# Altium PCB PixelClockController.PcbDoc
Units mm, origin at the board's own origin, x right, y up, seen from the top; angles counter-clockwise.
Board outline 100 x 45 mm, 2 copper layers (Component Side, Solder Side), stack 1.57 mm thick; 77 components, 52 nets, 289 pads, 48 vias.
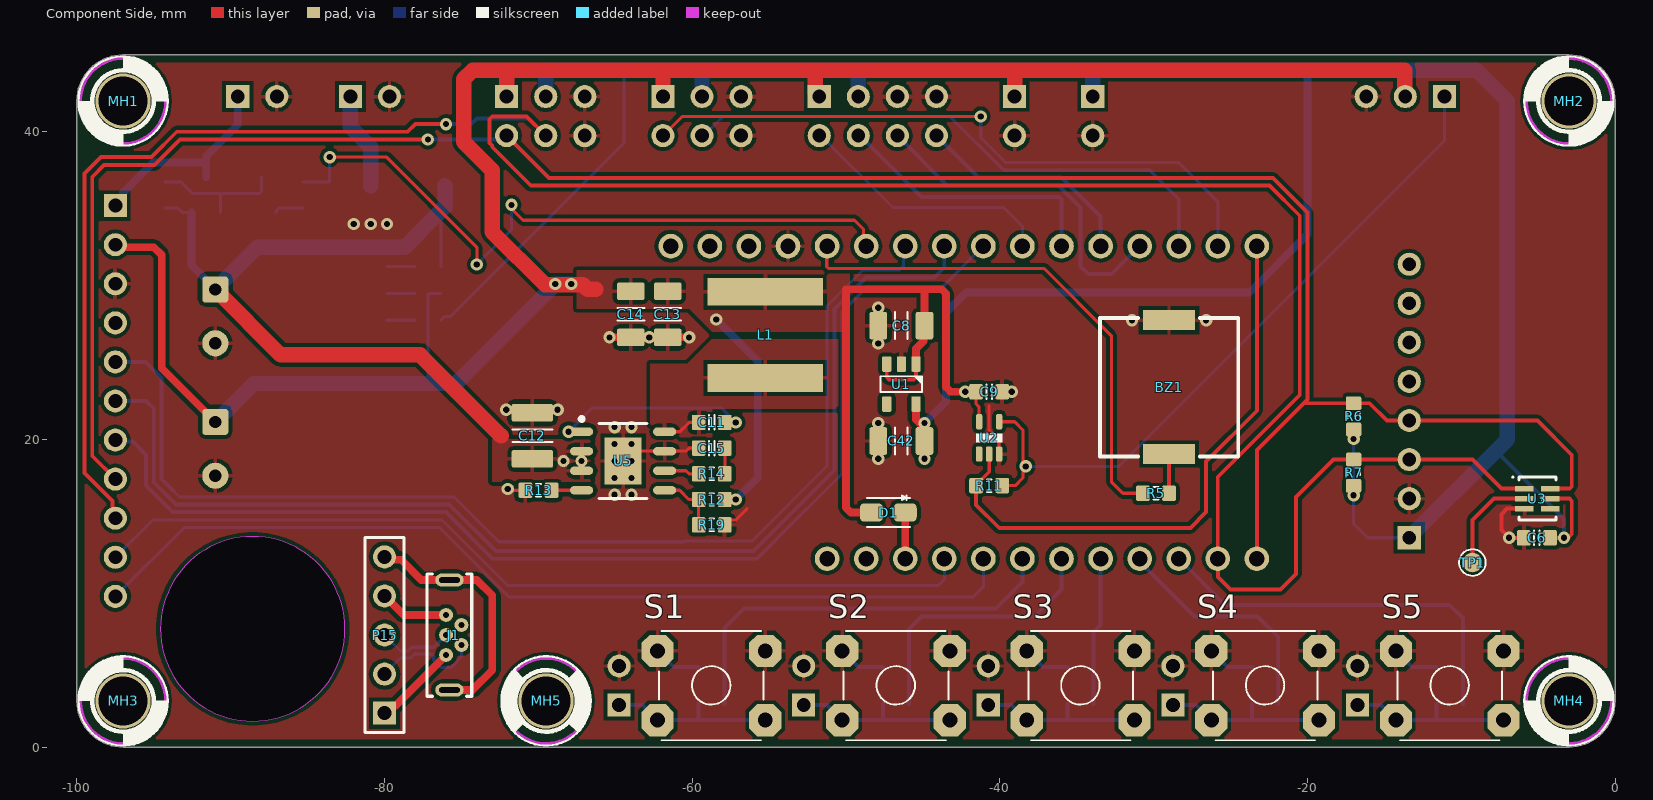
[diagram p0: Component Side view]
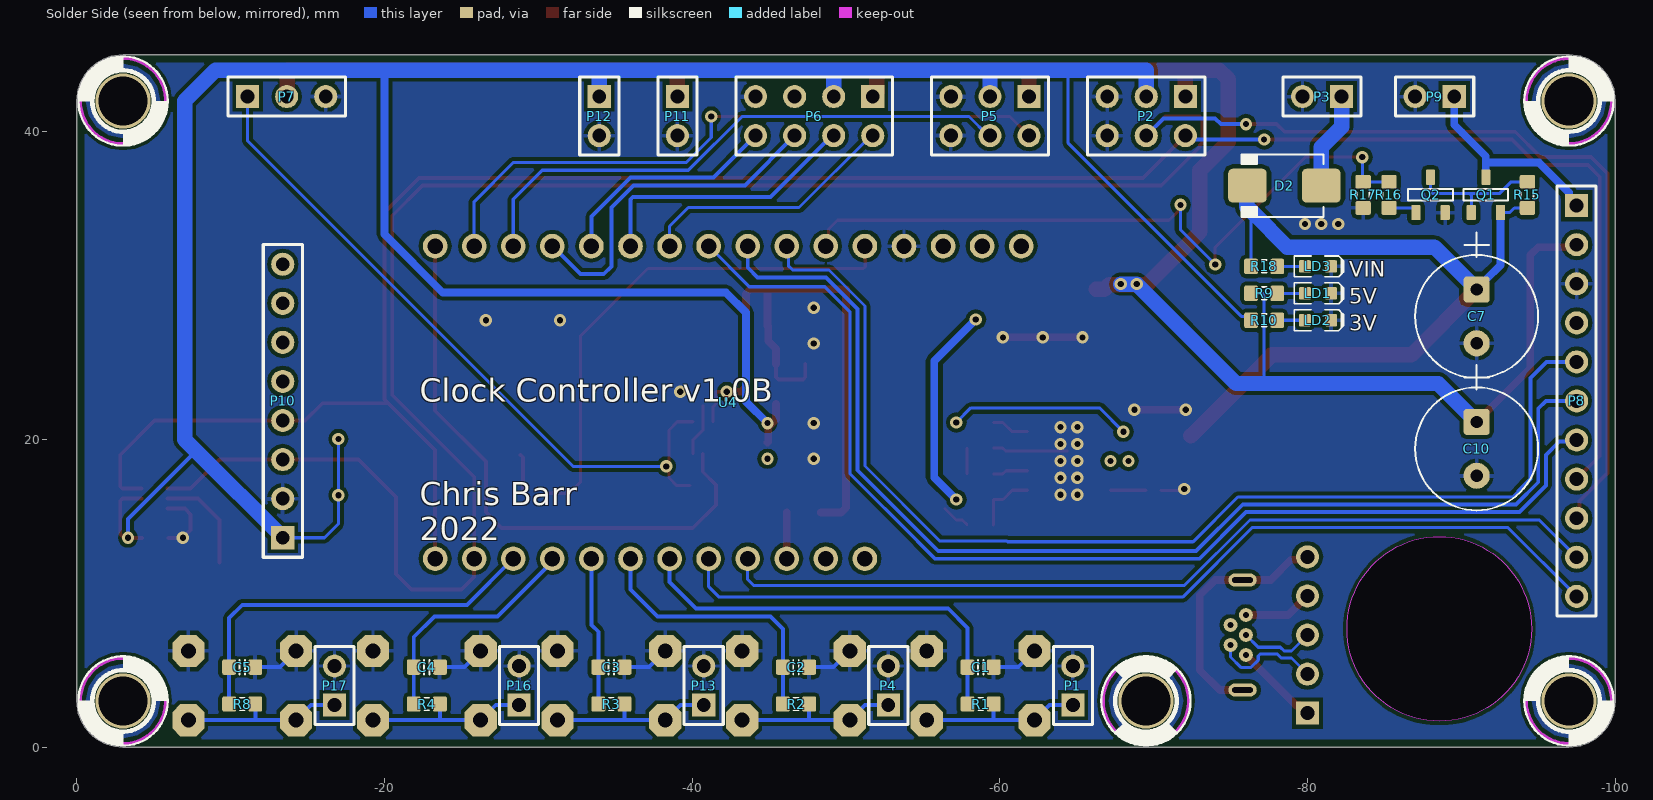
[diagram p1: Solder Side view, seen from below]
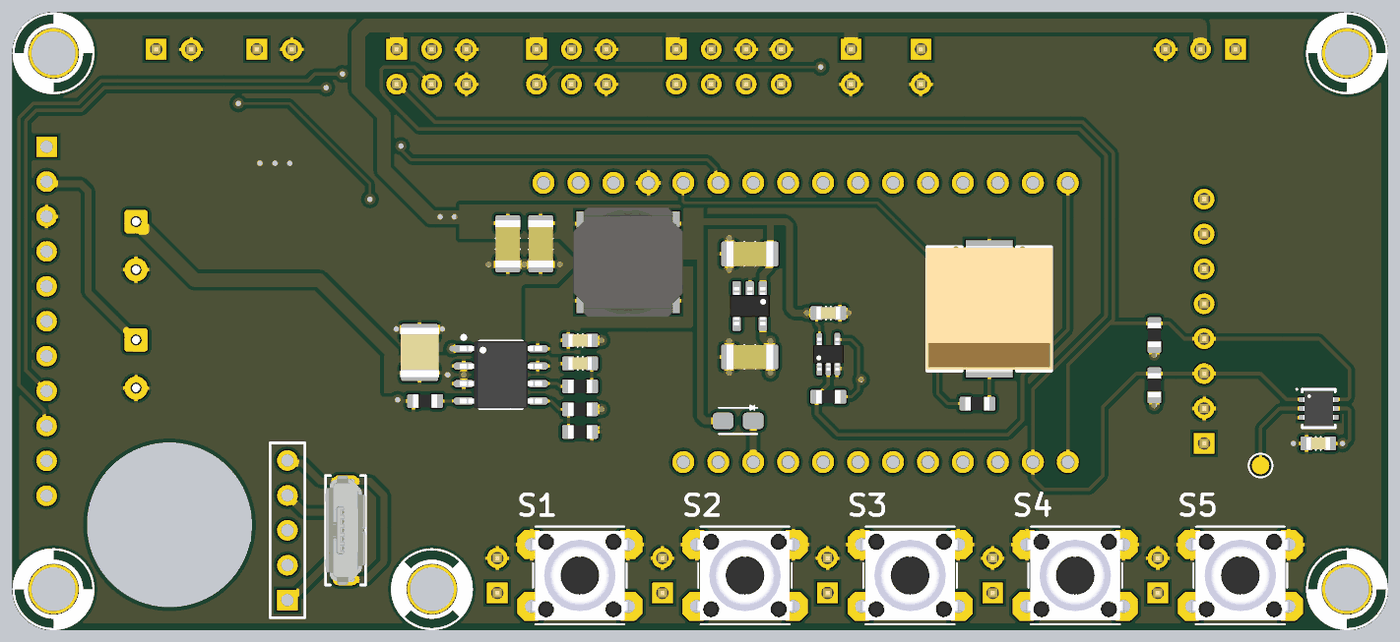
[diagram p2: 3D render of the assembled board from above, using the file's embedded part models]
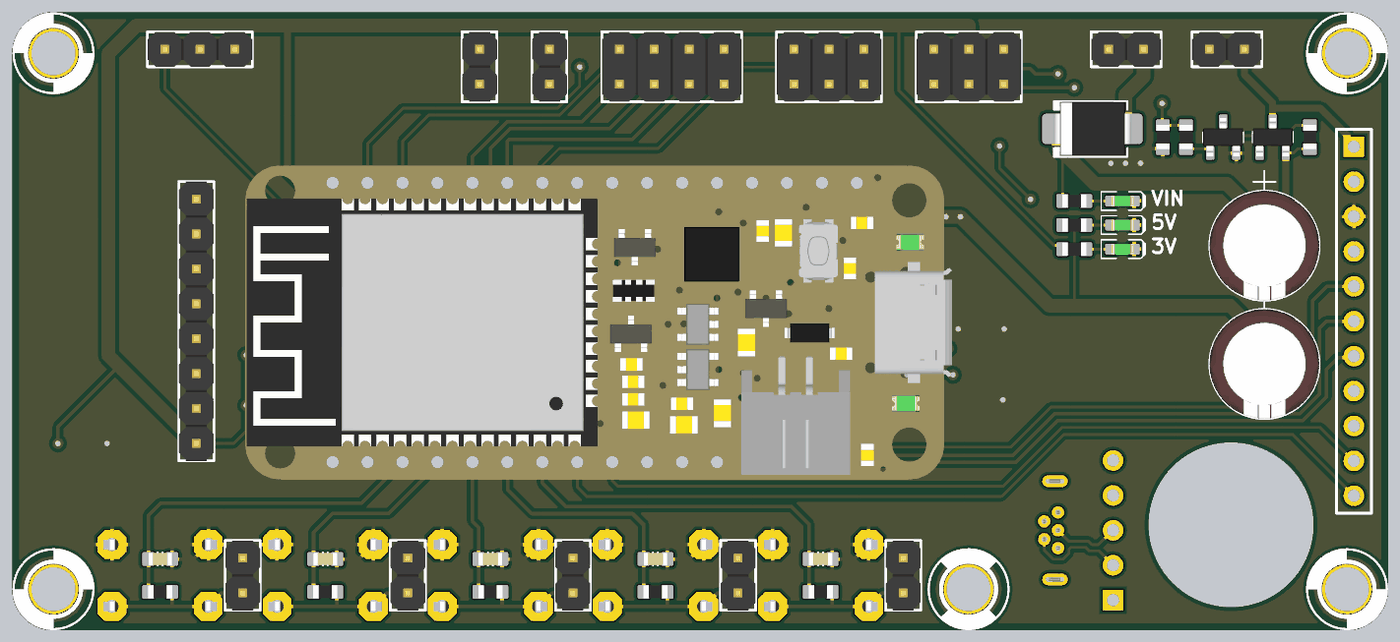
[diagram p3: 3D render of the assembled board from below, using the file's embedded part models]

## Layer stack, top to bottom
Top Solder: solder mask 0.0102, Solder Resist, Dk 3.5
Component Side: signal copper 0.035
Dielectric 3: prepreg 1.5, Dk 4.2
Solder Side: signal copper 0.035
Bottom Solder: solder mask 0.0102, Solder Resist, Dk 3.5

## Board outline
-100,2.993 -100,42 cw(c-97,42) -97.007,45 -3,45 cw(c-3,42) 0,42.007 0,3 cw(c-3,3) -2.993,0 -97,0 cw(c-97,3)
cut-out: -94.572,7.686 ccw(c-88.572,7.686) -88.572,1.686 ccw(c-88.572,7.686) -82.572,7.686 ccw(c-88.572,7.686) -88.572,13.686 ccw(c-88.572,7.686)

## Design rules (kind name [scope] priority, off if disabled: settings)
AssemblyTestPointUsage [All] p1 off:
AssemblyTestpoint [All] p1 off: testpointundercomponent=TRUE minsize=1.016 maxsize=2.54 preferedsize=1.524 minholesize=0 maxholesize=1.016 preferedholesize=0.813 testpointgrid=0.025 usegrid=TRUE gridtolerance=0 allowsidetop=TRUE allowsidebottom=TRUE
BoardOutlineClearance [All] p1: gap=0.254 ignorepadtopadclearanceinfootprint=FALSE except(0.5: Poly-OutlineEdge)
Clearance [All] p1: gap=0.25 ignorepadtopadclearanceinfootprint=FALSE except(0.2: Arc-SMDPad Track-SMDPad SMDPad-SMDPad)
ComponentClearance [All] p1: gap=0.2 collisioncheckmode=3 verticalgap=0.25 showdistances=FALSE
DiffPairsRouting [All] p1: maxlimit=1 minlimit=0.254 mostfreqgap=0.254 toplayer_minwidth=0.2 toplayer_maxwidth=0.4 toplayer_prefwidth=0.254 bottomlayer_minwidth=0.2 bottomlayer_maxwidth=0.4 bottomlayer_prefwidth=0.254 maxuncoupledlength=12.7
FabricationTestPointUsage [All] p1 off: valid=0 allowmultiple=FALSE
FabricationTestpoint [All] p1 off: side=3 testpointundercomponent=TRUE minsize=1.016 maxsize=2.54 preferedsize=1.524 minholesize=0 maxholesize=1.016 preferedholesize=0.813 testpointgrid=0.025 allowsidetop=TRUE allowsidebottom=TRUE usegrid=TRUE gridtolerance=0
HoleSize [All] p1: absolutevalues=TRUE maxlimit=4 minlimit=0.025 maxpercent=80.000 minpercent=20.000
MinimumSolderMaskSliver [All] p1: minsoldermaskwidth=0
NetAntennae [All] p1 off: netantennaetolerance=0
PolygonConnect PolygonConnect_Via [All vs IsVia] p1: connectstyle=Direct reliefconductorwidth=0.254 reliefentries=4 polygonreliefangle="90 Angle" airgapwidth=0.254
PolygonConnect [All] p2: connectstyle=Relief reliefconductorwidth=0.254 reliefentries=4 polygonreliefangle="90 Angle" airgapwidth=0.254
RoutingVias [All] p1: holewidth=0.4 width=0.8 viastyle="Through Hole" minholewidth=0.35 minwidth=0.7 maxholewidth=1 maxwidth=1.5
SilkToSilkClearance [All] p1: silktosilkclearance=0.1
SilkToSolderMaskClearance SilkscreenOverComponentPads [IsPad] p1: minsilkscreentomaskgap=0 clearancetoexposedcopper=TRUE
SolderMaskExpansion [All] p1: expansion=0.102 istentingtop=FALSE
Width Width_1 [All] p1: maxlimit=3 minlimit=0.2 preferedwidth=0.2 minimp=50.000000 maximp=50.000000 favimp=50.000000
19 further rules are at their usual default settings.

## Classes and differential pairs
differential pair USB: +USB_P -USB_N

## Components (designator, comment, footprint, x,y, rotation, side; value= is the part's Value field where it differs from the comment)
BZ1 "Piezo Transducer" PKMCS0909E4000-R1 -29,23.4 r90 top
C1 "Capacitor" CAPC1608X90N -58.75,5.2 r0 bottom value=0.1µF
C2 "Capacitor" CAPC1608X90N -46.75,5.2 r0 bottom value=0.1µF
C3 "Capacitor" CAPC1608X90N -34.75,5.2 r0 bottom value=0.1µF
C4 "Capacitor" CAPC1608X90N -22.75,5.2 r0 bottom value=0.1µF
C5 "Capacitor" CAPC1608X90N -10.75,5.2 r0 bottom value=0.1µF
C6 "Capacitor" CAPC1608X90N -5.088,13.606 r0 top value=0.1µF
C7 "CapE-8.0-THT-220uF-35V" CAPAE250P680X1220_VERT -91,28 r270 bottom value="220uF 35V"
C8 "Capacitor" CAPC3216X100N -46.4,27.4 r0 top value=22µF
C9 "Capacitor" CAPC1608X90N -40.69,23.1 r180 top value=0.1µF
C10 "CapE-8.0-THT-220uF-35V" CAPAE250P680X1220_VERT -91,19.39 r270 bottom value="220uF 35V"
C11 "Capacitor" CAPC1608X90N -58.727,21.105 r0 top value=0.1µF
C12 "Capacitor" CAPC3225X220N -70.39,20.235 r270 top value=10µF
C13 "Capacitor" CAPC3216X100N -61.59,28.135 r90 top value=22µF
C14 "Capacitor" CAPC3216X100N -63.99,28.135 r90 top value=22µF
C15 "Capacitor" CAPC1608X90N -58.727,19.435 r0 top value=2.7nF
C42 "Capacitor" CAPC3216X100N -46.4,19.9 r0 top value=22µF
D1 "" DIOM2616X08N -47.25,15.25 r180 top
D2 "Diode SK520BTR" DO-214AA -78.5,36.5 r0 bottom value="200V 5A"
J1 "Micro-USB B Socket" USB3131-XX-0230-X_revB -75.78,7.286 r90 top
L1 "Inductor SMD 3.6uH 4.9A" INDUCTOR_NR8040 -55.24,26.8 r90 top value=3.6uH
LD1 "LEDG  0603" "LED 1608-0603" -80.684,29.5 r180 bottom
LD2 "LEDG  0603" "LED 1608-0603" -80.684,27.75 r180 bottom
LD3 "LEDG  0603" "LED 1608-0603" -80.684,31.25 r180 bottom
MH1 "Screw Hole" M3-Hole-2 -97,42 r0 top
MH2 "Screw Hole" M3-Hole-2 -3,42 r90 top
MH3 "Screw Hole" M3-Hole-2 -97,3 r90 top
MH4 "Screw Hole" M3-Hole-2 -3,3 r0 top
MH5 "Screw Hole" M3-Hole-2 -69.5,3 r135 top
P1 "BTN1" HDR1X2-HEADER -64.75,2.73 r90 bottom
P2 "I2C" HDR2X3-Header -72.06,42.29 r0 bottom
P3 "PWR_IN" HDR1X2-HEADER -82.22,42.29 r0 bottom
P4 "BTN2" HDR1X2-HEADER -52.75,2.73 r90 bottom
P5 "UART" HDR2X3-Header -61.9,42.29 r0 bottom
P6 "SPI" HDR2X4-HEADER -51.74,42.29 r0 bottom
P7 "Header 3" HDR1X3-HEADER -11.1,42.29 r180 bottom
P8 "AMP" HDR1X11 -97.5,35.2 r270 bottom
P9 "SPKR_PWR" HDR1X2-HEADER -89.54,42.29 r0 bottom
P10 "RTC - DS3231 Breakout" HDR1X8-HEADER -13.384,13.61 r90 bottom
P11 "5V_AUX" HDR1X2-HEADER -39.04,42.29 r270 bottom
P12 "3V_AUX" HDR1X2-HEADER -33.96,42.29 r270 bottom
P13 "BTN3" HDR1X2-HEADER -40.75,2.73 r90 bottom
P15 "Header 5" HDR1X5 -80,2.206 r90 top
P16 "BTN4" HDR1X2-HEADER -28.75,2.73 r90 bottom
P17 "BTN5" HDR1X2-HEADER -16.75,2.73 r90 bottom
Q1 "Si2371EDS" "SOT23-3 New" -91.6,35.9 r90 bottom
Q2 "BC817" "SOT23-3 New" -88,35.9 r90 bottom
R1 "Resistor" "RES 1608-0603" -58.75,2.8 r0 bottom value=1K
R2 "Resistor" "RES 1608-0603" -46.75,2.8 r0 bottom value=1K
R3 "Resistor" "RES 1608-0603" -34.75,2.8 r0 bottom value=1K
R4 "Resistor" "RES 1608-0603" -22.75,2.8 r0 bottom value=1K
R5 "Resistor" "RES 1608-0603" -29.85,16.5 r0 top value=1K
R6 "Resistor" "RES 1608-0603" -17,21.5 r270 top value=10K
R7 "Resistor" "RES 1608-0603" -17,17.84 r270 top value=10K
R8 "Resistor" "RES 1608-0603" -10.75,2.8 r0 bottom value=1K
R9 "Resistor" "RES 1608-0603" -77.184,29.5 r0 bottom value=1K
R10 "Resistor" "RES 1608-0603" -77.184,27.75 r0 bottom value=1K
R11 "Res-0603-0R" "RES 1608-0603" -40.69,17 r0 top value=0R
R12 "Resistor" "RES 1608-0603" -58.727,16.095 r0 top value=115K
R13 "Resistor" "RES 1608-0603" -69.99,16.695 r0 top value=200K
R14 "Resistor" "RES 1608-0603" -58.727,17.765 r180 top value=15.8K
R15 "Resistor" "RES 1608-0603" -94.3,35.9 r270 bottom value=1K
R16 "Resistor" "RES 1608-0603" -85.3,35.9 r270 bottom value=1K
R17 "Resistor" "RES 1608-0603" -83.62,35.9 r90 bottom value=10K
R18 "Resistor" "RES 1608-0603" -77.184,31.25 r0 bottom value=10K
R19 "Resistor" "RES 1608-0603" -58.727,14.45 r180 top value=22.1K
S1 "SW_THT_PB_4.3mm" TACT-SWITCH-TS1143 -58.75,4 r0 top
S2 "SW_THT_PB_4.3mm" TACT-SWITCH-TS1143 -46.75,4 r0 top
S3 "SW_THT_PB_4.3mm" TACT-SWITCH-TS1143 -34.75,4 r0 top
S4 "SW_THT_PB_4.3mm" TACT-SWITCH-TS1143 -22.75,4 r0 top
S5 "SW_THT_PB_4.3mm" TACT-SWITCH-TS1143 -10.75,4 r0 top
TP1 "TESTPOINT" TP-R60 -9.28,12 r0 top
U1 "AP2112K-3.3TRG1" SOT23-5 -46.4,23.6 r270 top
U2 "74LVC1G17SE-7" SOT353 -40.69,20.1 r90 top
U3 "TSL25911FN" SON65P200X70-6N -5.053,16.15 r0 top
U4 "Feather Huzzah ESP32" "Adafruit Feather Huzzah ESP32" -51.23,32.57 r0 bottom locked
U5 "AP64500" SOIC127P600X140_HS-9N -64.49,18.6 r0 top

## Footprints (in the part's own frame and the unit in brackets; to place one, negate y for a bottom-side part, rotate by r counter-clockwise, add the part's x,y. Pads: shape width x height; smd on the part's side, far side on the other; paste and mask are expansions set on the pad)
"Adafruit Feather Huzzah ESP32" [mm]
  round 1.6 hole 1: 1(0,20.32) 2(2.54,20.32) 3(5.08,20.32) 4(7.62,20.32) 5(10.16,20.32) 6(12.7,20.32) 7(15.24,20.32) 8(17.78,20.32) 9(20.32,20.32) 10(22.86,20.32) 11(25.4,20.32) 12(27.94,20.32) 13(-10.16,0) 14(-7.62,0) 15(-5.08,0) 16(-2.54,0) 17(0,0) 18(2.54,0) 19(5.08,0) 20(7.62,0) 21(10.16,0) 22(12.7,0) 23(15.24,0) 24(17.78,0) 25(20.32,0) 26(22.86,0) 27(25.4,0) 28(27.94,0)
  body extent -17.05,-1.27 34.3,21.59, height 6.37
CAPAE250P680X1220_VERT [mm]
  round 0.508 on Mech15: 0(0,0)
  rrect25% 1.7x1.7 hole 0.8: 1(-1.75,0)
  round 1.7 hole 0.8: 2(1.75,0)
  silkscreen extent -5.45,-4 4,4, body extent -4,-4 4,4, height 11.5
CAPC1608X90N [mm] "Chip Capacitor, Body 1.6x0.8mm, EIA 0603, IPC Medium Density"
  round 0.254 on Mech15: 0(0,0)
  rrect25% 0.9x1 smd: 1(-0.85,0) 2(0.85,0)
  Component Side pour cut-out: -0.6,0.5 -0.4,0.7 0.4,0.7 0.6,0.5 0.6,-0.5 0.4,-0.7 -0.4,-0.7 -0.6,-0.5
  silkscreen extent -0.18,-0.48 0.18,0.48, body extent -0.85,-0.45 0.85,0.45, height 0.89
CAPC3216X100N [mm] "Chip Capacitor, Body 3.2x1.6mm, 1.0mm H, EIA 1206, IPC Medium Density"
  round 0.508 on Mech15: 0(0,0)
  rrect25% 1.15x1.8 smd: 1(-1.5,0) 2(1.5,0)
  silkscreen extent -0.4,-0.88 0.4,0.88, body extent -1.7,-0.9 1.7,0.9, height 1
CAPC3225X220N [mm] "Chip Capacitor, Body 3.2x2.5mm, EIA 1210, IPC Medium Density"
  round 0.508 on Mech15: 0(0,0)
  rrect25% 1.15x2.7 smd: 1(-1.5,0) 2(1.5,0)
  silkscreen extent -0.4,-1.3 0.4,1.3, body extent -1.8,-1.4 1.8,1.4, height 2.19
DIOM2616X08N [mm] "Molded Diode, 2-Leads, Body 2.60x1.60mm, IPC Medium Density"
  rrect50% 1.5x1.2 smd: A(1.1,0) K(-1.1,0)
  silkscreen extent -1.4,-1.11 1.4,0.95, body extent -1.35,-0.85 1.35,0.85, height 0.85
DO-214AA [mm] "JEDEC DO214 variation AA. SMB"
  round 0.508 on Mech15: 0(0,0)
  rrect25% 2.5x2.2 smd: A(-2.4,0) K(2.4,0)
  silkscreen extent -2.54,-2.03 2.79,2.03, body extent -2.8,-1.97 2.8,1.98, height 2.62
HDR1X2-HEADER [mm]
  rect 1.5x1.5 hole 0.9: 1(0,0)
  round 1.5 hole 0.9: 2(2.54,0)
  silkscreen extent -1.27,-1.27 3.81,1.27, body extent -1.27,-1.27 3.81,1.27, height 8.6
HDR1X3-HEADER [mm]
  rect 1.5x1.5 hole 0.9: 1(0,0)
  round 1.5 hole 0.9: 2(2.54,0) 3(5.08,0)
  silkscreen extent -1.27,-1.27 6.35,1.27, body extent -1.27,-1.27 6.35,1.27, height 8.6
HDR1X5 [mm] "Connector; Header; 5 Position"
  rect 1.5x1.5 hole 0.9: 1(0,0)
  round 1.5 hole 0.9: 2(2.54,0) 3(5.08,0) 4(7.62,0) 5(10.16,0)
  silkscreen extent -1.27,-1.27 11.43,1.27
HDR1X8-HEADER [mm]
  rect 1.5x1.5 hole 0.9: 1(0,0)
  round 1.5 hole 0.9: 2(2.54,0) 3(5.08,0) 4(7.62,0) 5(10.16,0) 6(12.7,0) 7(15.24,0) 8(17.78,0)
  silkscreen extent -1.27,-1.27 19.05,1.27, body extent -1.27,-1.27 19.05,1.27, height 8.6
HDR1X11 [mm] "Connector; Header; 11 Position"
  rect 1.5x1.5 hole 0.9: 1(0,0)
  round 1.5 hole 0.9: 2(2.54,0) 3(5.08,0) 4(7.62,0) 5(10.16,0) 6(12.7,0) 7(15.24,0) 8(17.78,0) 9(20.32,0) 10(22.86,0) 11(25.4,0)
  silkscreen extent -1.27,-1.27 26.67,1.27
HDR2X3-Header [mm]
  rect 1.5x1.5 hole 0.9: 1(0,0)
  round 1.5 hole 0.9: 2(0,2.54) 3(2.54,0) 4(2.54,2.54) 5(5.08,0) 6(5.08,2.54)
  silkscreen extent -1.27,-1.27 6.35,3.81, body extent -1.27,-1.27 6.35,3.81, height 8.6
HDR2X4-HEADER [mm]
  rect 1.5x1.5 hole 0.9: 1(0,0)
  round 1.5 hole 0.9: 2(0,2.54) 3(2.54,0) 4(2.54,2.54) 5(5.08,0) 6(5.08,2.54) 7(7.62,0) 8(7.62,2.54)
  silkscreen extent -1.27,-1.27 8.89,3.81, body extent -1.27,-1.27 8.89,3.81, height 8.6
INDUCTOR_NR8040 [mm]
  rect 1.8x7.5 smd: 1(-2.8,0) 2(2.8,0)
  body extent -4,-4 4,4, height 4
"LED 1608-0603" [mm]
  round 0.254 on Mech15: 0(0,0)
  rrect25% 0.8x0.8 smd: 1(-0.85,0) 2(0.85,0)
  Component Side pour cut-out: -0.5,0.5 0.5,0.5 0.5,-0.5 -0.5,-0.5
  silkscreen extent -1.55,-0.67 1.68,0.67, body extent -0.8,-0.4 0.8,0.4, height 0.75
M3-Hole-2 [mm]
  round 3.6 hole 3.2: M3(0,0)
  silkscreen extent -2.9,-2.93 2.9,2.93
PKMCS0909E4000-R1 [mm]
  rect 1.3x3.4 smd: 1(-4.35,0) 2(4.35,0)
  silkscreen extent -4.5,-4.5 4.5,4.5, body extent -4.6,-4.6 4.6,4.6, height 1.96
"RES 1608-0603" [mm]
  round 0.254 on Mech15: 0(0,0)
  rrect25% 0.9x1 smd: 1(-0.85,0) 2(0.85,0)
  Component Side pour cut-out: -0.6,0.5 -0.4,0.7 0.4,0.7 0.6,0.5 0.6,-0.5 0.4,-0.7 -0.4,-0.7 -0.6,-0.5
  silkscreen extent -0.15,-0.41 0.15,0.41, body extent -0.87,-0.47 0.88,0.48, height 0.54
SOIC127P600X140_HS-9N [mm] "SOIC, 8-Leads, Body 4.88x3.88mm, Pitch 1.27mm, Thermal Pad 3.05x2.41mm, IPC Medium Density"
  oval 1.5x0.55 smd: 1(-2.7,1.905) 2(-2.7,0.635) 3(-2.7,-0.635) 4(-2.7,-1.905) 5(2.7,-1.905) 6(2.7,-0.635) 7(2.7,0.635) 8(2.7,1.905)
  rect 2.41x3.05 smd: 9(0,0)
  silkscreen extent -2.82,-2.45 1.55,2.85, body extent -3,-2.45 3,2.45, height 1.4
SON65P200X70-6N [mm] "SON, 6-Leads, Body 2.40x2.00mm, Pitch 0.65mm, IPC Medium Density"
  rect 1.2x0.35 smd: 1(-0.84,0.65) 2(-0.84,0) 3(-0.84,-0.65) 4(0.84,-0.65) 5(0.84,0) 6(0.84,0.65)
  silkscreen extent -1.65,-1.4 1.2,1.45, body extent -1.1,-1.25 1.1,1.25, height 0.7
"SOT23-3 New" [mm] "SOT23, 3 pin"
  round 0.5 on Mech15: 0(0,0)
  rrect25% 1x0.6 smd: 1(-1.15,0.95) 2(-1.15,-0.95) 3(1.15,0)
  silkscreen extent -0.38,-1.45 0.38,1.45, body extent -1.4,-1.45 1.4,1.45, height 1.29
SOT23-5 [mm]
  round 0.5 on Mech15: 0(0,0)
  rrect25% 1x0.6 smd: 1(-1.3,0.95) 2(-1.3,0) 3(-1.3,-0.95) 4(1.3,-0.95) 5(1.3,0.95)
  silkscreen extent -0.51,-1.35 0.51,1.35, body extent -1.4,-1.45 1.4,1.45, height 1.44
SOT353 [mm] "Small outline 2.1mm L x 1.25mm W x 1mm H; 5LD SC-70; SC-88A"
  round 0.5 on Mech15: 0(0,0)
  rrect50% 1x0.4 smd: 1(-1.05,0.65) 2(-1.05,0) 3(-1.05,-0.65) 4(1.05,-0.65) 5(1.05,0.65)
  silkscreen extent -0.3,-0.85 0.3,0.85, body extent -1.2,-1.1 1.2,1.1, height 1.1
TACT-SWITCH-TS1143 [mm] "Bondtact sealed TH tact switch"
  round 0.508 on Mech15: 0(0,0)
  oct 2.1x2.1 hole 0.965: 1(-3.5,-2.25) 1(3.5,-2.25) 2(-3.5,2.25) 2(3.5,2.25)
  silkscreen extent -3.4,-3.56 3.4,3.56, body extent -4.13,-3.25 4.13,3.25, height 4.3
TP-R60 [mm]
  round 1.27 smd paste-1.27: 1(0,0)
  silkscreen extent -0.86,-0.86 0.86,0.86, body extent -0.76,-0.76 0.76,0.76, height 0.25
USB3131-XX-0230-X_revB [mm] "Micro USB Receptacle, Type B, Through-Hole, Vertical, with 2.3mm Shell Stakes"
  round 0.9 hole 0.4: 1(-1.3,0.22) 2(-0.65,-0.78) 3(0,0.22) 4(0.65,-0.78) 5(1.3,0.22)
  oval 0.85x1.85 hole 0.35 slot 1.35 at 90 deg: S(-3.575,0) S(3.575,0)
  silkscreen extent -3.98,-1.45 3.98,1.45, body extent -3.97,-1.47 3.98,1.47, height 5.64

## Part data
BZ1: "AUDIO PIEZO TRANSDUCER 12.5V SMD 9 x 9MM", Supplier Part Number 1=490-9647-1-ND, Supplier 1=Digi-Key
C1 C2 C3 C4 C5 C6 C9 C11: library part UMJ107BB7104KAHT, "CAP CER 0.1UF 50V X7R 0603", Manufacturer 1="Taiyo Yuden", Operating Temperature="-55°C ~ 125°C", Package=0402, Package / Case="0603 (1608 Metric)", Supplier Part Number 1=587-4474-1-ND, Temperature Coefficient=X7R, TOLERANCE=±10%, Voltage=50V, Manufacturer Part Number 1=UMJ107BB7104KAHT, Note="Approved sub OK", Revision="July-2002: Re-released for DXP Platform.", Size / Dimension="0.063\" L x 0.031\" W (1.60mm x 0.80mm)", Supplier 1=Digi-Key, Thickness (Max)="0.039\" (1.00mm)", Type=X5R
C7 C10: "CAP ALUM 220UF 20% 35V RADIAL", Supplier Part Number 1=732-8946-1-ND, Note="Approved sub OK", Published=8-Jun-2000, Publisher="Altium Limited", Revision="July-2002: Re-released for DXP Platform.", Supplier 1=Digi-Key
C8 C13 C14 C42: library part EMK316ABJ226KL-T, "CAP CER 22UF 16V X5R 1206", Manufacturer 1="Taiyo Yuden", Operating Temperature="-55°C ~ 85°C", Package=0402, Package / Case="1206 (3216 Metric)", Supplier Part Number 1=587-5521-1-ND, Temperature Coefficient=X5R, TOLERANCE=±10%, Voltage=16V, Manufacturer Part Number 1=EMK316ABJ226KL-T, Note="Approved sub OK", Revision="July-2002: Re-released for DXP Platform.", Size / Dimension="0.126\" L x 0.063\" W (3.20mm x 1.60mm)", Supplier 1=Digi-Key, Thickness (Max)="0.071\" (1.80mm)", Type=X5R
C12: library part GMJ325KB7106KMHP, "CAP CER 10UF 35V X7R 1210", Manufacturer 1="Taiyo Yuden", Operating Temperature="-55°C ~ 125°C", Package=0402, Package / Case="1210 (3225 Metric)", Supplier Part Number 1=587-4890-1-ND, Temperature Coefficient=X7R, TOLERANCE=±10%, Voltage=35V, Manufacturer Part Number 1=GMJ325KB7106KMHP, Note="Approved sub OK", Revision="July-2002: Re-released for DXP Platform.", Size / Dimension="0.126\" L x 0.098\" W (3.20mm x 2.50mm)", Supplier 1=Digi-Key, Thickness (Max)="0.110\" (2.80mm)", Type=X5R
C15: library part C1608X7R2A222K080AE, "CAP CER 2700PF 50V X7R 0603", Manufacturer 1="TDK Corporation", Operating Temperature="-55°C ~ 125°C", Package=0402, Package / Case="0603 (1608 Metric)", Supplier Part Number 1=1292-1423-2-ND, Temperature Coefficient=X7R, TOLERANCE=±10%, Voltage=100V, Manufacturer Part Number 1=C1608X7R2A222K080AE, Note="Approved sub OK", Revision="July-2002: Re-released for DXP Platform.", Size / Dimension="0.063\" L x 0.031\" W (1.60mm x 0.80mm)", Supplier 1=Digi-Key, Thickness (Max)="0.035\" (0.90mm)", Type=X5R
D1: library part "Diode Schottky 2A 40V (SS24FL)", "DIODE SCHOTTKY 40V 2A SOD123F", Manufacturer 1="ON Semiconductor", Manufacturer Part Number 1=SS24FL, Supplier Part Number 1=SS24FLCT-ND, Code - JEDEC=SOD-123F, Note="Approved sub OK", Published=8-Jun-2000, Publisher="Altium Limited", Revision="July-2002: Re-released for DXP Platform.", Supplier 1=Digi-Key
D2: "DIODE SCHOTTKY 200V 5A SMB", Supplier Part Number 1=1655-1602-1-ND, Code - JEDEC=DO-214-AB, Published=8-Jun-2000, Publisher="Altium Limited", Revision="July-2002: Re-released for DXP Platform.", Supplier 1=Digi-Key
J1: library part "Micro-USB B Socket Vertical", "MICRO B SKT, VERTICAL, TH, 30\",", Supplier Part Number 1=2073-USB3131-30-0230-ACT-ND, Note="Approved sub OK", Supplier 1=Digi-Key
L1: "FIXED IND 3.6UH 4.9A 19.5 MOHM", Supplier Part Number 1=587-1998-1-ND, Published=24-Mar-1999, Publisher="Altium Limited", Revision="July-2002: Re-released for DXP Platform.", Supplier 1=Digi-Key
LD1 LD2 LD3: "LED GREEN CLEAR CHIP SMD 0603", Supplier Part Number 1=160-1435-2-ND, Note="Approved sub OK", Supplier 1=Digi-Key
P1 P3 P4 P9 P11 P12 P13 P16 P17: library part "Header 1X2", "Header, 2-Pin", Manufacturer 1="Generic Header", Note="Approved sub OK"
P2 P5: library part "Header 2X3", "Header, 3-Pin, Dual row", Manufacturer 1="Generic Header", Note="Approved sub OK"
P6: library part "Header 2X4", "Header, 4-Pin, Dual row", Manufacturer 1="Generic Header", Note="Approved sub OK"
P7: library part "Header 1X3", "Header, 3-Pin", Manufacturer 1="Generic Header", Note="Approved sub OK"
P8: library part "Header 11", "Header, 11-Pin", LatestRevisionDate=17-Jul-2002, LatestRevisionNote="Re-released for DXP Platform.", Publisher="Altium Limited"
P10: library part "Header 1X8", "Header, 8-Pin", Manufacturer 1="Generic Header", Note="Approved sub OK"
P15: "Header, 5-Pin", LatestRevisionDate=17-Jul-2002, LatestRevisionNote="Re-released for DXP Platform.", Publisher="Altium Limited"
Q1: library part "MOSFET - Si2371EDS", "MOSFET SMD P-CH 30V 4.8A SOT-23-3", Supplier Part Number 1=SI2371EDS-T1-GE3CT-ND, FET Type="MOSFET P-Channel, Metal Oxide", Supplier 1=Digi-Key
Q2: library part "Transistor - NPN - 45V 500MA - BC817", "TRANS NPN 45V 500MA TO236AB", Supplier Part Number 1=1727-6186-1-ND, Supplier 1=Digi-Key
R1 R2 R3 R4 R5 R8 R9 R10 R15 R16: library part RC0603FR-071KL, "RES SMD 1K OHM 1% 1/10W 0603", Manufacturer 1=Yageo, Operating Temperature="-55°C ~ 155°C", Package / Case="0603 (1608 Metric)", Power (Watts)="0.1W, 1/10W", Supplier Part Number 1=311-1.00KHRCT-ND, Temperature Coefficient=±100ppm/°C, TOLERANCE=±1%, Composition="Thick Film", Features="Moisture Resistant", Height - Seated (Max)="0.022\" (0.55mm)", Manufacturer Part Number 1=RC0603FR-071KL, Note="Approved sub OK", Published=8-Jun-2000, Publisher="Altium Limited", Revision="July-2002: Re-released for DXP Platform.", Size / Dimension="0.063\" L x 0.031\" W (1.60mm x 0.80mm)", Supplier 1=Digi-Key
R6 R7 R17 R18: library part RC0603FR-0710KL, "RES SMD 10K OHM 1% 1/10W 0603", Manufacturer 1=Yageo, Operating Temperature="-55°C ~ 155°C", Package / Case="0603 (1608 Metric)", Power (Watts)="0.1W, 1/10W", Supplier Part Number 1=311-10.0KHRCT-ND, Temperature Coefficient=±100ppm/°C, TOLERANCE=±1%, Composition="Thick Film", Features="Moisture Resistant", Height - Seated (Max)="0.022\" (0.55mm)", Manufacturer Part Number 1=RC0603FR-0710KL, Note="Approved sub OK", Published=8-Jun-2000, Publisher="Altium Limited", Revision="July-2002: Re-released for DXP Platform.", Size / Dimension="0.063\" L x 0.031\" W (1.60mm x 0.80mm)", Supplier 1=Digi-Key
R11: "RES 0 OHM JUMPER 1/10W 0603", Supplier Part Number 1=311-0.0GRCT-ND, Note="Approved sub OK", Published=8-Jun-2000, Publisher="Altium Limited", Revision="July-2002: Re-released for DXP Platform.", Supplier 1=Digi-Key
R12: library part RC0603FR-07115KL, "RES SMD 115K OHM 1% 1/10W 0603", Manufacturer 1=Yageo, Operating Temperature="-55°C ~ 155°C", Package / Case="0603 (1608 Metric)", Power (Watts)="0.1W, 1/10W", Supplier Part Number 1=311-115KHRCT-ND, Temperature Coefficient=±100ppm/°C, TOLERANCE=±1%, Composition="Thick Film", Features="Moisture Resistant", Height - Seated (Max)="0.022\" (0.55mm)", Manufacturer Part Number 1=RC0603FR-07115KL, Note="Approved sub OK", Published=8-Jun-2000, Publisher="Altium Limited", Revision="July-2002: Re-released for DXP Platform.", Size / Dimension="0.063\" L x 0.031\" W (1.60mm x 0.80mm)", Supplier 1=Digi-Key
R13: library part RC0603FR-07200KL, "RES SMD 200K OHM 1% 1/10W 0603", Manufacturer 1=Yageo, Operating Temperature="-55°C ~ 155°C", Package / Case="0603 (1608 Metric)", Power (Watts)="0.1W, 1/10W", Supplier Part Number 1=311-200KHRCT-ND, Temperature Coefficient=±100ppm/°C, TOLERANCE=±1%, Composition="Thick Film", Features="Moisture Resistant", Height - Seated (Max)="0.022\" (0.55mm)", Manufacturer Part Number 1=RC0603FR-07200KL, Note="Approved sub OK", Published=8-Jun-2000, Publisher="Altium Limited", Revision="July-2002: Re-released for DXP Platform.", Size / Dimension="0.063\" L x 0.031\" W (1.60mm x 0.80mm)", Supplier 1=Digi-Key
R14: library part RC0603FR-0715K8L, "RES SMD 15.8K OHM 1% 1/10W 0603", Manufacturer 1=Yageo, Operating Temperature="-55°C ~ 155°C", Package / Case="0603 (1608 Metric)", Power (Watts)="0.1W, 1/10W", Supplier Part Number 1=311-15.8KHRCT-ND, Temperature Coefficient=±100ppm/°C, TOLERANCE=±1%, Composition="Thick Film", Features="Moisture Resistant", Height - Seated (Max)="0.022\" (0.55mm)", Manufacturer Part Number 1=RC0603FR-0715K8L, Note="Approved sub OK", Published=8-Jun-2000, Publisher="Altium Limited", Revision="July-2002: Re-released for DXP Platform.", Size / Dimension="0.063\" L x 0.031\" W (1.60mm x 0.80mm)", Supplier 1=Digi-Key
R19: library part RC0603FR-0722K1L, "RES SMD 22.1K OHM 1% 1/10W 0603", Manufacturer 1=Yageo, Operating Temperature="-55°C ~ 155°C", Package / Case="0603 (1608 Metric)", Power (Watts)="0.1W, 1/10W", Supplier Part Number 1=311-22.1KHRCT-ND, Temperature Coefficient=±100ppm/°C, TOLERANCE=±1%, Composition="Thick Film", Features="Moisture Resistant", Height - Seated (Max)="0.022\" (0.55mm)", Manufacturer Part Number 1=RC0603FR-0722K1L, Note="Approved sub OK", Published=8-Jun-2000, Publisher="Altium Limited", Revision="July-2002: Re-released for DXP Platform.", Size / Dimension="0.063\" L x 0.031\" W (1.60mm x 0.80mm)", Supplier 1=Digi-Key
S1 S2 S3 S4 S5: "6 X 6 MM, 12 MM ACTUATOR HEIGHT", Manufacturer 1="CUI Devices", Manufacturer Part Number 1=TS02-66-120-BK-160-LCR-D, Package / Case="6.5x6.5mm; 4.3mm stem", Supplier Part Number 1=2223-TS02-66-120-BK-160-LCR-D-ND, Material="Brass/Nylon/Ag plating", Supplier 1=Digi-Key
TP1: "SMD test pin"
U1: library part "Regulator - AP2112K 3.3V Linear Regulator", "IC REG LINEAR 3.3V 600MA SOT25", Manufacturer 1="Diodes Incorporated", Supplier Part Number 1=AP2112K-3.3TRG1DICT-ND, Manufacturer Part Number 1=AP2112K-3.3TRG1, Supplier 1=Digi-Key
U2: library part "Buffer Non-Inverting Schmitt Trigger 74LVC1G17SE-7", "IC BUF NON-INVERT 5.5V SOT353", Supplier Part Number 1=74LVC1G17SE-7CT-ND, Supplier 1=Digi-Key
U3: library part "IC - Optical Sensor Ambient - I²C 6-WFDFN", "SENSOR OPT AMBIENT 6DFN", Supplier Part Number 1=TSL25911FNCT-ND, Supplier 1=Digi-Key
U4: library part "Adafruit Feather - ESP32 Huzzah"
U5: library part "Regulator - AP64500 Buck Regulator", "IC DCDC CONV HV BUCK SO-8EP", Supplier Part Number 1=31-AP64500SP-13CT-ND, Supplier 1=Digi-Key

## Via types
v1: diameter 0.8, hole 0.4, Component Side to Solder Side, tented both sides, 48 vias

## Nets (pads, with @x,y where several pads share a name; then routed paths per layer and width w, separated by ;. In a path a pad name is that pad's centre, name@x,y a point inside that pad or via, vN(x,y) a via of type N, cw(c..) or ccw(c..) an arc to the next point about the centre after c; other vN are vias at no path point)
+3V3: C6.2 C42.2 P2.3 P5.3 P6.3 P10.1 P12.1 R6.2 R7.2 R10.2 U1.5 U3.5 | length 192.5
  Component Side w0.254: C6.2 v1(-3.326,13.606) -3.072,13.606 -2.818,13.86 -2.818,16.001 -2.967,16.15 U3.5
  Component Side w0.5: -45.45,21.4 U1.5 -45.45,21.3 -44.95,20.8 -44.95,19.85 C42.2@-44.9,19.8
  Solder Side w0.2: R10.2 -76.082,28.002 -75.701,28.002 -64.44,39.264 -64.44,44.01 ; v1(-17,20.035) v1(-17,16.375) -17,14.508 -16.102,13.61 P10.1
  Solder Side w0.254: -7.747,19.247 -3.326,14.826 v1(-3.326,13.606)
  Solder Side w0.5: v1(-44.9,21.058) -43.5,22.458 -43.5,28.25 -42.2,29.55 -23.782,29.55 -20,33.332 -20,44.01
  Solder Side w1: P2.3 -69.52,44.01 -64.44,44.01 -59.36,44.01 ; P5.3 -59.36,44.01 ; P6.3 -49.2,44.01 ; P12.1 -33.96,43.97 -33.92,44.01 ; P10.1 -7.747,19.247 -7,19.994 -7,42 -9.01,44.01 -20,44.01 -33.92,44.01 ; -59.36,44.01 -49.2,44.01 ; -49.2,44.01 -33.92,44.01
  other v1: -44.9,18.742
+5V: C8.2 C9.2 C10.1 C13.2 C14.2 D1.A L1.2 P2.1 P5.1 P6.1 P7.2 P8.2 P11.1 R9.2 R12.2 U1.1 U1.3 U2.5 | length 193
  Component Side w0.2: v1(-42.25,23.1) C9.2 -41.54,22.3 -41.34,22.1 U2.5
  Component Side w0.254: U1.3 -47.35,24.049 -47.201,23.9 -45.599,23.9 -45.45,24.049 U1.1
  Component Side w0.5: P8.2 -97.34,32.5 -95,32.5 -94.488,31.988 -94.488,24.628 C10.1 ; -50,29.521 -50,15.571 -49.679,15.25 D1.A ; -50,29.758 -44.9,29.758 ; U1.1 -45.45,25.9 -44.95,26.4 -44.95,27.35 C8.2 -44.9,29.758 ; v1(-42.25,23.1) -43.2,23.1 -43.493,23.393 -43.493,29.465 -43.786,29.758 -44.9,29.758
  Component Side w1: P2.1 -72.06,44.01 ; -66.256,29.762 -66.803,29.762 -67.107,30.066 -69.566,30.066 -73,33.5 -73,37.5 -74.85,39.35 -74.85,43.424 -74.264,44.01 -72.06,44.01 ; P5.1 -61.9,44.01 ; P6.1 -51.99,42.54 -51.99,43.94 -52.06,44.01 ; P11.1 -39.04,44.01 ; P7.2 -13.687,42.337 -13.687,44.01 -39.04,44.01 ; -72.06,44.01 -61.9,44.01 ; -61.9,44.01 -52.06,44.01 ; -52.06,44.01 -39.04,44.01
  Solder Side w0.2: -77.184,23.64 -77.184,29.383 -77.067,29.5 R9.2
  Solder Side w0.5: v1(-58.44,27.8) -55.74,25.1 -55.74,17.526 v1(-57.171,16.095)
  Solder Side w1: C10.1 -88.5,23.64 -77.184,23.64 -75.36,23.64 v1(-68.9,30.1) v1(-67.858,30.1)
AMP_PDN: P8.10 U4.4 | length 58.2
  Solder Side w0.2: P8.10 -95.072,14.768 -76.268,14.768 -72,10.5 -44,10.5 -43.61,10.89 U4.4
AMP_RST: P8.11 U4.5 | length 62.2
  Solder Side w0.2: P8.11 -93.038,14.262 -76.398,14.262 -71.886,9.75 -41.75,9.75 -41.07,10.43 U4.5
BTN_1: C1.2 R1.2 U4.6 | length 27.1
  Solder Side w0.254: R1.2 C1.2 -57.9,7.75 -56.65,9 -40.25,9 -38.53,10.72 U4.6
BTN_2: C2.2 R2.2 U4.7 | length 17.8
  Solder Side w0.254: R2.2 C2.2 -45.9,7.676 -45.08,8.496 -37.754,8.496 -36,10.25 -36,12.24 U4.7
BTN_3: C3.2 R3.2 U4.8 | length 9.6
  Solder Side w0.254: R3.2 C3.2 -33.9,7.5 -33.45,7.95 U4.8
BTN_4: C4.2 R4.2 U4.9 | length 15.6
  Solder Side w0.254: U4.9 -30.91,12.062 -27.348,8.5 -23.25,8.5 -21.9,7.15 C4.2 R4.2
BTN_5: C5.2 R8.2 U4.10 | length 25.7
  Solder Side w0.254: U4.10 -25.37,9.25 -10.75,9.25 -9.9,8.4 C5.2 R8.2
BUZZER: R5.1 U4.17 | length 33.6
  Component Side w0.2: U4.17 -51.25,32.55 -51.25,31.234 -51.133,31.117 -37.117,31.117 -32.75,26.75 -32.75,17.25 -32,16.5 R5.1
GND: BZ1.2 C1.1 C2.1 C3.1 C4.1 C5.1 C6.1 C7.2 C8.1 C9.1 C10.2 C12.1 C13.1 C14.1 C15.1 C42.1 LD1.2 LD2.2 LD3.2 P1.2 P2.5 P2.6 P3.2 P4.2 P5.5 P5.6 P6.5 P6.7 P7.3 P8.3 P9.2 P10.2 P11.2 P12.2 P13.2 P16.2 P17.2 Q2.2 R13.1 R17.1 R19.1 S1.2 S2.2 S3.2 S4.2 S5.2 U1.2 U2.3 U3.3 U4.16 U5.7 U5.9 | length 40.6
  Component Side w0.2: v1@-71.89,16.677 -70.508,16.677 R13.1@-70.49,16.695 ; U5.9@-64.39,19.235 U5.7 -60.399,19.235 -60.199,19.435 C15.1 ; R19.1 -57.578,14.75 -57.184,14.75 -56.433,15.5 ; -40.69,22.2 -40.69,20.6 -40.04,19.95 U2.3 ; C9.1@-39.84,23.05 C9.1 v1(-39.222,23.1)
  Component Side w0.254: C6.1 v1(-6.89,13.606) -7.39,14.106 -7.39,15.13 -7.02,15.5 U3.3
  Component Side w0.5: v1(-72.09,21.935) v1(-68.745,21.935) ; v1(-65.381,26.635) C14.1 v1(-62.79,26.635) C13.1 v1(-60.199,26.635)
  Solder Side w0.254: S1.2@-62.25,6.25 -61.2,5.2 C1.1 ; S2.2@-50.25,6.25 -49.2,5.2 C2.1 ; S3.2@-38.25,6.25 -37.2,5.2 C3.1 ; S4.2@-26.25,6.25 -25.2,5.2 C4.1 ; S5.2@-14.25,6.25 -13.2,5.2 C5.1
  other v1: -65.04,16.4 -63.94,16.4 -71.99,16.777 -65.04,17.5 -63.94,17.5 -65.04,18.6 -63.94,18.6 -47.9,18.742 -65.04,19.7 -63.94,19.7 -65.04,20.8 -63.94,20.8 -47.9,21.058 -47.9,26.242 -31.413,27.75 -26.587,27.75 -47.9,28.558 -82,34 -80.9,34 -79.834,34
I2C_SCL: P2.4 P8.9 P10.3 R7.1 U3.1 U4.11 | length 168.8
  Component Side w0.254: P8.9 -97.685,15.065 -97.685,16.011 -99.504,17.83 -99.504,37.283 -98.433,38.354 -95.159,38.354 -93.509,40.004 -78.496,40.004 -78,40.5 v1(-76,40.5) ; P2.4 -70.77,41 -73,41 -73.187,40.813 -73.187,39.283 -73,39.096 -73,39 -70.496,36.496 -22.459,36.496 -20.504,34.541 -20.504,22.896 -25.83,17.57 U4.11 -25.819,12.239 -25.819,11.069 -25,10.25 -21.75,10.25 -20.75,11.25 -20.75,16.25 -18.31,18.69 R7.1 P10.3 -9.28,18.69 -7.39,16.8 U3.1
  Solder Side w0.254: v1(-76,40.5) -74.377,40.5 -74,40.877 -70.647,40.877 P2.4
I2C_SDA: P2.2 P8.8 P10.4 R6.1 U3.6 U4.12 | length 148.6
  Component Side w0.254: P8.8 -99,18.92 -99,37.074 -98.224,37.85 -94.95,37.85 -93.3,39.5 v1(-77.184,39.5) ; P2.2 -69.31,37 -22.25,37 -20,34.75 -20,22.6 -20.25,22.35 ; U4.12 -23.29,19.31 -20.25,22.35 ; U3.6 -2.967,16.8 -2.818,16.949 -2.818,19 -5.048,21.23 P10.4 -14.83,21.23 -15.95,22.35 R6.1 -20.25,22.35
  Solder Side w0.254: v1(-77.184,39.5) -72.832,39.5 -72.82,39.512 -72.298,39.512 P2.2
I2S_BCLK: P8.6 U4.20 | length 75.9
  Solder Side w0.254: P8.6 -95.504,22.5 -95.004,22 -95.004,17.217 -93.568,15.781 -75.791,15.781 -72.76,12.75 -56,12.75 -50.75,18 -50.75,28.48 -48.696,30.534 -44.25,30.534 -43.61,31.174 U4.20
I2S_DOUT: P8.7 U4.21 | length 75.4
  Solder Side w0.2: -54.691,13.347 -50.25,17.787 -50.25,28.305 -48.627,29.929 -43.711,29.929 U4.21
  Solder Side w0.254: P8.7 -97.401,19.861 -96.369,19.861 -95.508,19 -95.508,17.008 -93.777,15.277 -76,15.277 -75.851,15.128 -72.969,12.246 -55.791,12.246 -54.691,13.347
I2S_WS: P8.5 U4.19 | length 74.8
  Solder Side w0.2: -93.725,16.65 -93.332,16.258 -75.477,16.258 -72.566,13.347 -60.5,13.347 -60.461,13.386 -56.114,13.386 -51.23,18.27 -51.23,28.675 -48.894,31.011 -46.53,31.011 -46.25,31.291 -46.25,32.47 U4.19
  Solder Side w0.254: P8.5 -95.54,25.04 -94.5,24 -94.5,17.426 -93.725,16.65
NEOPIXEL: R11.1 U2.2 U4.28 | length 38.3
  Component Side w0.254: U2.2 -40.69,17.9 -41.54,17.05 R11.1 -41.54,15.75 -40.04,14.25 -27.613,14.25 -26.587,15.276 -26.587,18.571 -23.29,21.868 U4.28
NEOPIXEL_5V: P7.1 R11.2 U2.4 | length 45.5
  Component Side w0.2: U2.4 -39.04,21.15 -38.49,20.6 v1@-38.49,18.25 ; R11.2 -38.99,17 -38.49,17.5 v1@-38.49,18.25 ; v1(-38.311,18.25) v1@-38.49,18.25
  Solder Side w0.2: v1(-38.311,18.25) -32.249,18.25 -11.1,39.399 P7.1
NetBZ1_1: BZ1.1 R5.2 | length 2.6
  Component Side w0.254: R5.2 -29,18.84 BZ1.1@-28.84,19
NetC11_1: C11.1 L1.1 U5.8 | length 2.5
  Component Side w0.2: U5.8 -60.799,20.505 -60.199,21.105 C11.1
NetC11_2: C11.2 U5.1 | length 11.9
  Solder Side w0.2: v1(-68.032,20.505) -66.486,22.051 -58.118,22.051 v1(-57.171,21.105)
NetC15_2: C15.2 R14.1 | length 1.7
  Component Side w0.2: R14.1 C15.2
NetD1_K: D1.K U4.3 | length 3
  Component Side w0.5: U4.3 D1.K
NetD2_A: D2.A P3.1 | length 6.3
  Solder Side w1: P3.1 -82.22,40.32 -80.9,39 D2.A
NetJ1_1: J1.1 P15.1 | length 5.6
  Component Side w0.5: P15.1 -79.5,2.706 -79.28,2.706 J1.1
NetJ1_5: J1.5 P15.4 | length 4.5
  Component Side w0.5: P15.4 -78.76,8.586 J1.5
NetJ1_S: J1.S P15.5 | length 16.2
  Component Side w0.5: P15.5 -79.809,12.175 -78.918,12.175 -77.604,10.861 -75.78,10.861 -74,10.861 -73,9.861 -73,5 -74.289,3.711 J1.S@-75.78,3.711
NetLD1_1: LD1.1 R9.1 | length 1.8
  Solder Side w0.2: LD1.1 R9.1
NetLD2_1: LD2.1 R10.1 | length 1.8
  Solder Side w0.2: LD2.1 R10.1
NetLD3_1: LD3.1 R18.1 | length 1.8
  Solder Side w0.2: LD3.1 R18.1
NetP1_1: P1.1 R1.1 S1.1 | length 11
  Solder Side w0.254: P1.1 -63.23,2.73 -62.25,1.75 -59.6,1.75 ; R1.1 -59.6,1.75 ; S1.1@-55.25,1.75 -59.6,1.75
NetP4_1: P4.1 R2.1 S2.1 | length 11
  Solder Side w0.254: P4.1 -51.23,2.73 -50.25,1.75 -47.6,1.75 ; R2.1 -47.6,1.75 ; S2.1@-43.25,1.75 -47.6,1.75
NetP13_1: P13.1 R3.1 S3.1 | length 11
  Solder Side w0.254: P13.1 -39.23,2.73 -38.25,1.75 -35.6,1.75 ; R3.1 -35.6,1.75 ; S3.1@-31.25,1.75 -35.6,1.75
NetP16_1: P16.1 R4.1 S4.1 | length 11
  Solder Side w0.254: P16.1 -27.23,2.73 -26.25,1.75 -23.6,1.75 ; R4.1 -23.6,1.75 ; S4.1@-19.25,1.75 -23.6,1.75
NetP17_1: P17.1 R8.1 S5.1 | length 11
  Solder Side w0.254: P17.1 -15.23,2.73 -14.25,1.75 -11.6,1.75 ; R8.1 -11.6,1.75 ; S5.1@-7.25,1.75 -11.6,1.75
NetQ1_1: Q1.1 Q2.3 R15.1 | length 8.9
  Solder Side w0.2: R15.1 -93.25,36.75 -92.5,36 -90.533,36 ; Q1.1 -90.65,35.883 -90.533,36 ; Q2.3 -88,36.117 -88.117,36 -90.533,36
NetQ2_1: Q2.1 R16.2 | length 1.9
  Solder Side w0.2: Q2.1 -87.05,34.85 -86.85,35.05 R16.2
NetR12_1: R12.1 R19.2 U5.5 | length 4.1
  Component Side w0.2: U5.5 -60.817,16.695 -60.217,16.095 R12.1 R19.2
NetR13_2: R13.2 U5.4 | length 2.3
  Component Side w0.2: R13.2@-69.49,16.695 U5.4
NetR14_2: R14.2 U5.6 | length 2.3
  Component Side w0.2: U5.6 -60.399,17.965 -60.199,17.765 R14.2
NetTP1_1: TP1.1 U3.2 | length 6.7
  Component Side w0.254: TP1.1 -9.28,14.75 -7.88,16.15 U3.2
PWR_ENA: R16.1 R17.2 U4.18 | length 46.1
  Component Side w0.2: v1(-83.566,38.354) -79.863,38.354 -74,32.491 v1(-74,31.377) ; v1(-71.75,35.25) -71.75,35 -71,34.25 -49.447,34.25 -48.867,33.67 -48.867,32.747 U4.18
  Solder Side w0.2: R16.1 R17.2 -83.566,36.804 v1(-83.566,38.354) ; v1(-74,31.377) -71.75,33.627 v1(-71.75,35.25)
SPI1_GPIO: P6.2 U4.22 | length 16.9
  Solder Side w0.2: P6.2 -51.625,39.75 -46.949,35.074 -39.75,35.074 -38.53,33.854 U4.22
SPI1_MISO: P6.6 U4.25 | length 22.5
  Solder Side w0.254: P6.6 -43.429,36.519 -36.195,36.519 -34.75,35.074 -34.75,31.25 -34.25,30.75 -32.73,30.75 U4.25
SPI1_MOSI: P6.8 U4.24 | length 14.8
  Solder Side w0.254: P6.8 -41.393,37.023 -35.986,37.023 -33.45,34.487 U4.24
SPI1_SCK: P6.4 U4.23 | length 18
  Solder Side w0.254: P6.4 -49.085,39.75 -45.085,35.75 -36.139,35.75 -35.99,35.601 U4.23
UART_RX: P5.4 U4.26 | length 36.8
  Solder Side w0.2: P5.4 -59.25,39.75 -58,41 -43.25,41 -39.75,37.5 -30.25,37.5 -28.37,35.62 U4.26
UART_TX: P5.2 U4.27 | length 42.6
  Component Side w0.2: P5.2 -60.65,41 v1(-41.242,41)
  Solder Side w0.2: v1(-41.242,41) -41.242,39.628 -39.614,38 -28.37,38 -25.83,35.46 U4.27
USB_N: J1.2 P15.2 | length 7.1
  Solder Side w0.2: P15.2 -78.957,5.789 -78.298,5.789 -78.048,6.039 -76.917,6.039 -76.8,5.922 -76.8,5.655 -76.331,5.186 -75.669,5.186 -75,5.855 J1.2
USB_P: J1.3 P15.3 | length 4.9
  Solder Side w0.2: P15.3 -78.957,6.243 -78.486,6.243 -78.236,6.493 -76.8,6.493 -76.007,7.286 J1.3
V_MAIN: C7.1 C12.2 D2.K Q1.2 R15.2 R18.2 U5.2 U5.3 | length 51.3
  Component Side w1: C7.1 -86.75,25.5 -77.686,25.5 -72.421,20.235
  Solder Side w0.2: R15.2 -93.45,35.05 -93.15,34.75 Q1.2 ; -76.509,34.675 -76.334,34.5 R18.2
  Solder Side w0.5: Q1.2 -92.55,31.332 -91.6,30.382 -91.6,30.35 -91.25,30 C7.1@-91.218,30
  Solder Side w1: C7.1@-90.65,30.1 -88.25,32.5 -78.684,32.5 -76.509,34.675 -76.055,35.13 -76.055,36.455 D2.K
  other v1: -68.36,18.6 -67.19,18.6
V_SPKR: P8.1 P9.1 Q1.3 | length 13.4
  Solder Side w0.5: P8.1 -97,35.7 -97,36.05 -95.05,38 -91.6,38 ; Q1.3 -91.6,38 ; P9.1 -89.54,40.46 -90.04,39.96 -91.6,38.4 -91.6,38
pads on no net: C1.0 C2.0 C3.0 C4.0 C5.0 C6.0 C7.0 C8.0 C9.0 C10.0 C11.0 C12.0 C13.0 C14.0 C15.0 C42.0 D2.0 J1.4 LD1.0 LD2.0 LD3.0 MH1.M3 MH2.M3 MH3.M3 MH4.M3 MH5.M3 P8.4 P10.5 P10.6 P10.7 P10.8 Q1.0 Q2.0 R1.0 R2.0 R3.0 R4.0 R5.0 R6.0 R7.0 R8.0 R9.0 R10.0 R11.0 R12.0 R13.0 R14.0 R15.0 R16.0 R17.0 R18.0 R19.0 S1.0 S2.0 S3.0 S4.0 S5.0 U1.0 U1.4 U2.0 U2.1 U3.4 U4.1 U4.2 U4.13 U4.14 U4.15

## Polygon pours and split planes (outlines as drawn)
V_MAIN on Component Side "V_MAIN_L01_P004" (solid, pour order 4): -73,20 -66.5,20 -66.5,17.265 -73,17.265
NetC11_1 on Component Side "NETC11_1_L01_P002" (solid, pour order 2): -62.725,19.935 -62.725,24.915 -60.309,24.918 -58.727,26.5 -50.5,26.5 -50.5,22.2 -50.7,22 -58.699,22 -58.699,20.163 -58.727,20.135 -60.8,20.135 -61,19.935
+5V on Component Side "+5V_L01_P000" (solid, pour order 0): -67.5,31 -67.5,28.5 -60.199,28.5 -58.699,27 -49.761,27 -49.761,31
GND on Component Side "GND_L01_P005" (solid, remove dead copper, pour order 5): 0,45 0,0 -100,0 -100,45
GND on Solder Side "GND_L02_P001" (solid, pour order 1): 0,45 0,0 -100,0 -100,45

## Keep-outs
Keep-Out Layer:
  circle w0.254: c-69.5,3 r2.8
  circle w0.254: c-3,3 r2.8
  circle w0.254: c-3,42 r2.8
  circle w0.254: c-97,42 r2.8
  circle w0.254: c-97,3 r2.8

## Silkscreen, mask and mechanical layers (free items; w line width, h text height)
Bottom Overlay:
  text "VIN" at -82.711,30.575 h1
  text "5V" at -82.711,28.825 h1
  text "3V" at -82.711,27.075 h1
  text "Clock Controller v1.0B /  /  / Chris Barr / 2022" at -22.301,13.457 h1.5
Mechanical 1:
  lines w0.254: -100,22.5 0,22.5 ; -15.67,9.8 -15.67,35.2 2.11,35.2 2.11,9.8 -15.67,9.8
  text "RTC" at -10.09,15.446 h5 r270
Mechanical 4:
  circle w0.254: c-88.572,7.686 r6
  lines w0.254: -100,2.993 ccw(c-97,3) -97,0 -2.993,0 ccw(c-3,3) 0,3 0,42.007 ccw(c-3,42) -3,45 -97.007,45 ccw(c-97,42) -100,42 -100,2.993